# Altium PCB LNA_1.7GHz_main_board.PcbDoc
Units mm, origin at the board's own origin, x right, y up, seen from the top; angles counter-clockwise.
Board outline 141.8 x 55.8 mm, 4 copper layers (Top Layer, AGND, Layer 1, Bottom Layer), stack 0.831 mm thick; 30 components, 13 nets, 109 pads, 31 vias.
Unrouted connection lines stored in the file: 63.
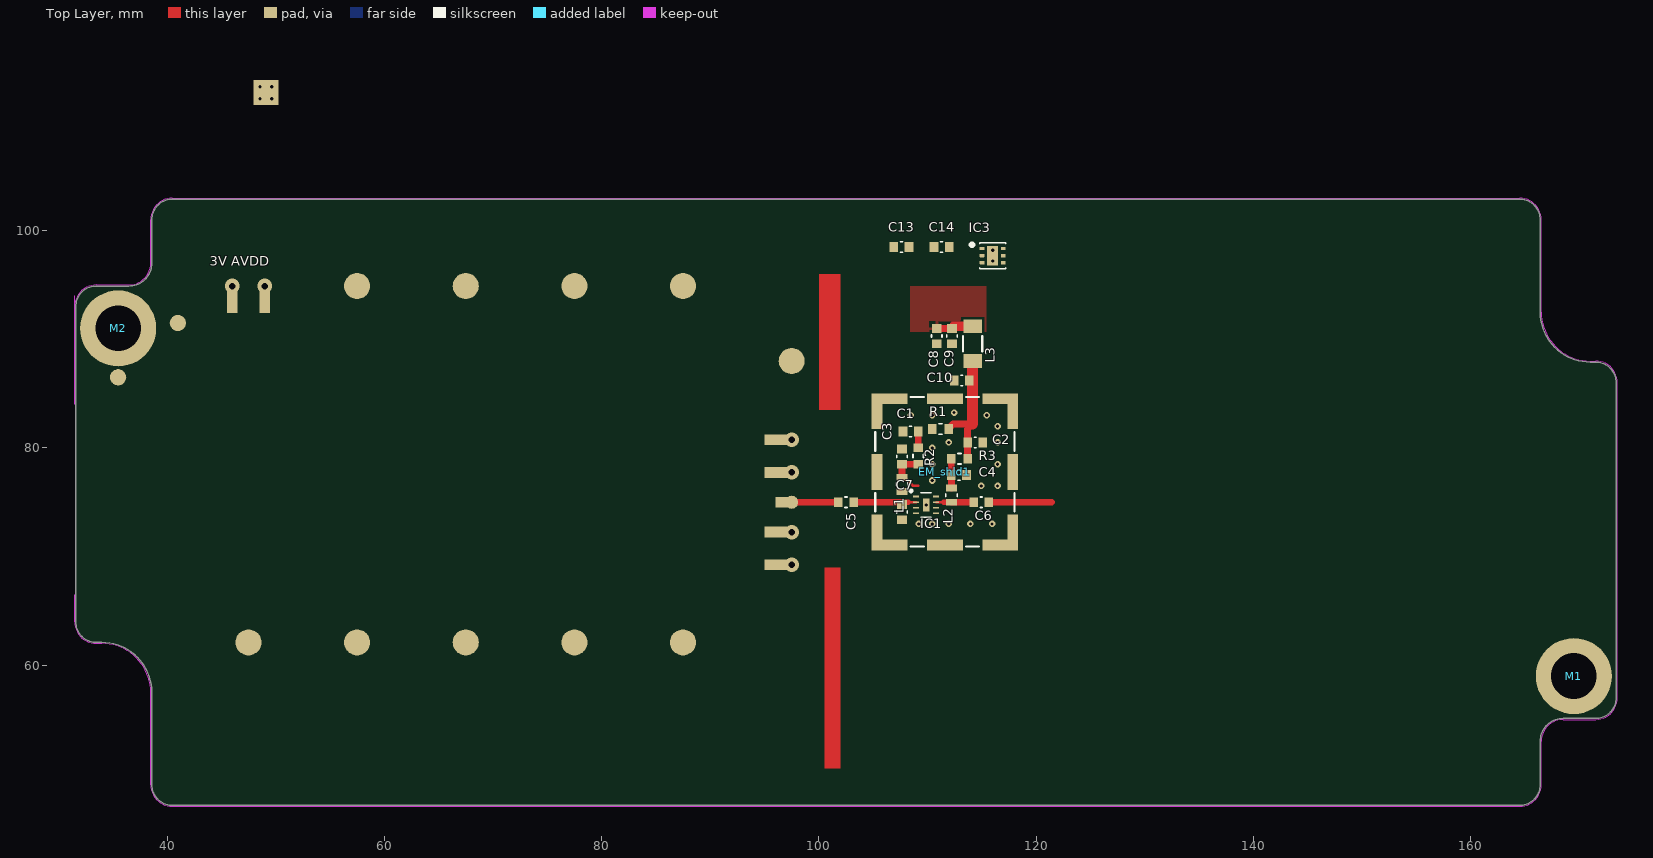
[diagram p0: Top Layer view]
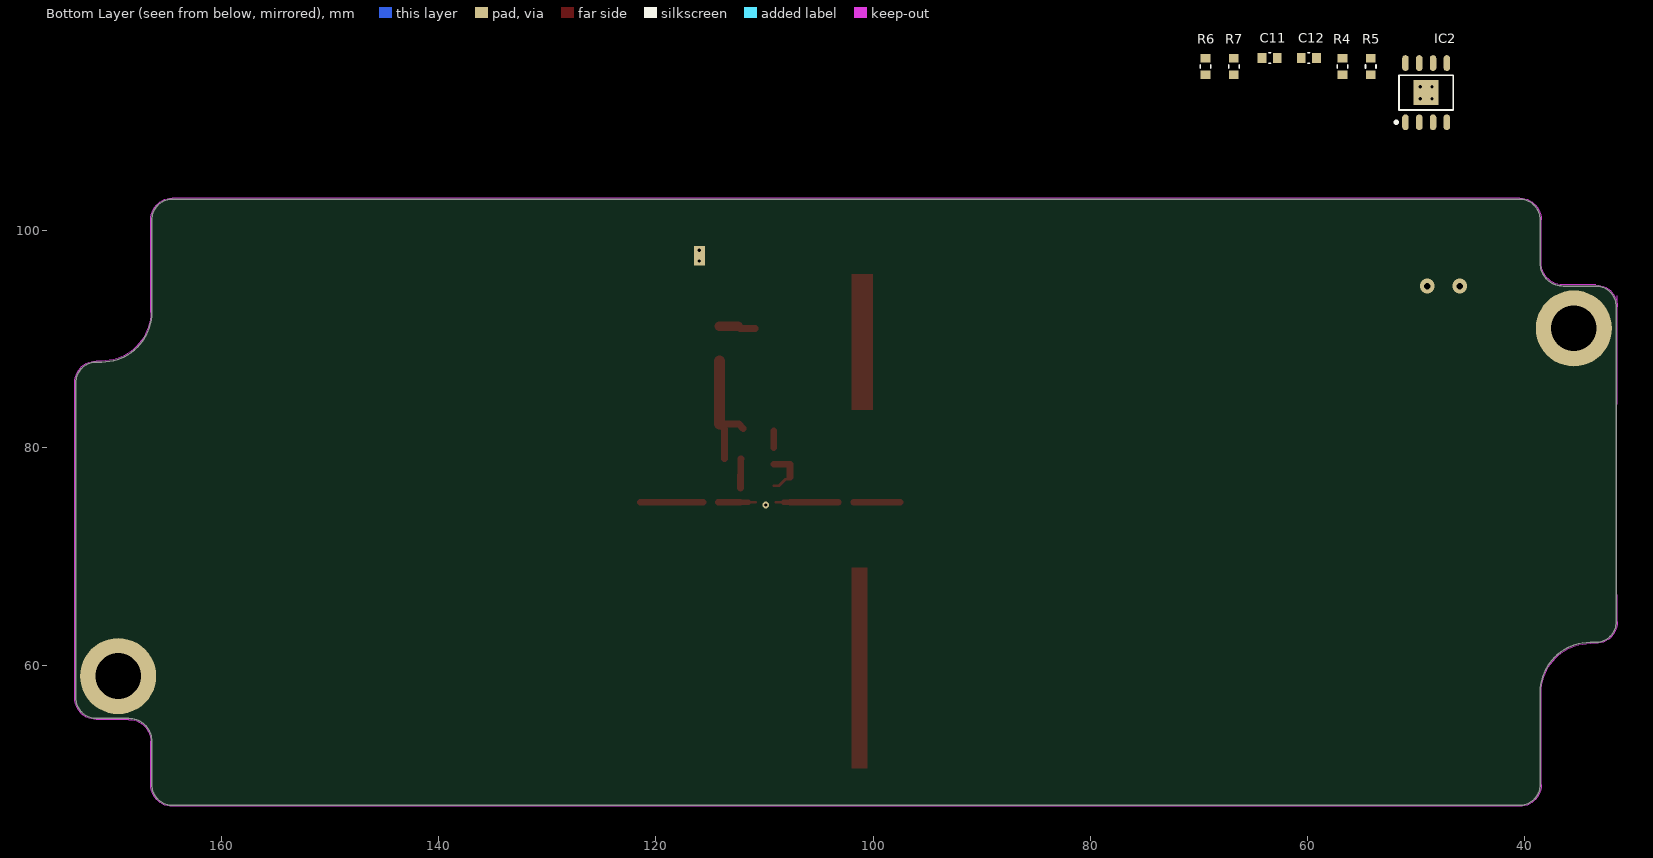
[diagram p1: Bottom Layer view, seen from below]
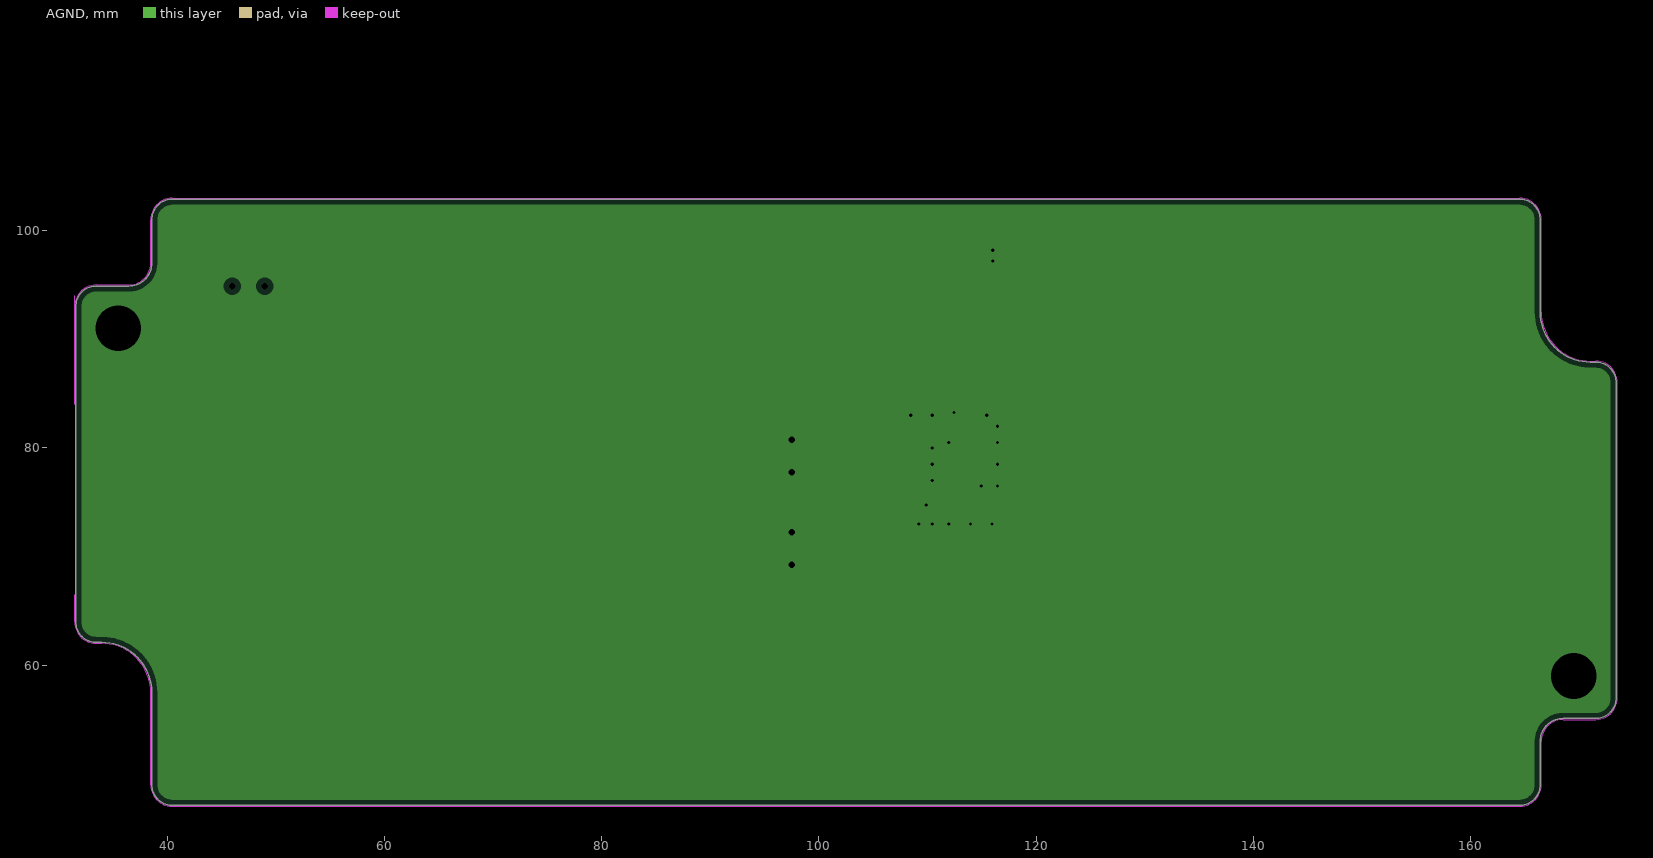
[diagram p2: AGND, clearances drawn from the general rule]

## Layer stack, top to bottom
Top Solder: solder mask 0.0102, Solder Resist, Dk 3.5
Top Layer: signal copper 0.018
Core 1: core 0.3, FR4 (Tg170), Dk 4.4
AGND: plane copper 0.018, net AGND
Prepreg 1: prepreg 0.125, 2116 (Tg170), Dk 5.1
Layer 1: signal copper 0.035
Core 2: core 0.3, FR4 (Tg170), Dk 4.4
Bottom Layer: signal copper 0.035
Bottom Solder: solder mask 0.0102, Solder Resist, Dk 3.5

## Board outline
33.5,62.1 34,62.1 cw(c34,57.5) 38.6,57.5 38.6,49 ccw(c40.5,49) 40.5,47.1 164.5,47.1 ccw(c164.5,49) 166.4,49 166.4,53 cw(c168.5,53) 168.5,55.1 171.5,55.1 ccw(c171.5,57) 173.4,57 173.4,86 ccw(c171.5,86) 171.5,87.9 171,87.9 cw(c171,92.5) 166.4,92.5 166.4,101 ccw(c164.5,101) 164.5,102.9 40.5,102.9 ccw(c40.5,101) 38.6,101 38.6,97 cw(c36.5,97) 36.5,94.9 33.5,94.9 ccw(c33.5,93) 31.6,93 31.6,64 ccw(c33.5,64)

## Design rules (kind name [scope] priority, off if disabled: settings)
Clearance [All] p1: gap=0.254 ignorepadtopadclearanceinfootprint=FALSE except(0: Arc-Hole Track-Hole SMDPad-Hole THPad-Hole Via-Hole Fill-Hole Poly-Hole Region-Hole Text-Hole)
PlaneClearance [All] p1: clearance=0.508
PlaneConnect [All] p1: planeconnectstyle=Direct reliefexpansion=0.508 reliefentries=4 reliefconductorwidth=0.254 reliefairgap=0.254
PolygonConnect [All] p1: thpad.connectstyle=Relief thpad.reliefconductorwidth=0.254 thpad.reliefentries=4 thpad.polygonreliefangle="90 Angle" thpad.airgapwidth=0.254 smdpad.connectstyle=Relief smdpad.reliefconductorwidth=0.254 smdpad.reliefentries=4 smdpad.polygonreliefangle="90 Angle" smdpad.airgapwidth=0.254 via.connectstyle=Direct via.reliefconductorwidth=0.254 via.reliefentries=4 via.polygonreliefangle="90 Angle" via.airgapwidth=0.254
RoutingVias [All] p1: holewidth=0.711 width=1.27 viastyle="Through Hole" minholewidth=0.711 minwidth=1.27 maxholewidth=0.711 maxwidth=1.27
SolderMaskExpansion [All] p1: expansion=0.102 istentingtop=FALSE
Width [All] p1: maxlimit=2.54 minlimit=0.15 preferedwidth=0.254 toplayer_prefwidth=0.575 impedanceprofiledriven=TRUE impedanceprofileid={E40D00CD-2FD9-45DB-8FD6-8CAF1FACEA0F} impedanceprofilevalue=50.000000 minimp=50.000000 maximp=50.000000 favimp=50.000000
28 further rules are at their usual default settings.

## Components (designator, comment, footprint, x,y, rotation, side; value= is the part's Value field where it differs from the comment)
C1 "4.7uF" C0603#1 108.45,81.5 r0 top
C2 "4.7uF" C0603#1 114.4,80.5 r0 top
C3 "100pF" C0603#1 107.65,79.2 r270 top
C4 "100pF" C0603#1 112.9,77.5 r0 top
C5 "100pF" C0603#2 102.5,75 r0 top locked
C6 "100pF" C0603#2 114.95,75 r0 top
C7 "100pF" C0603#1 107.65,74.1 r90 top
C8 "4.7uF" C0603#1 110.85,90.3 r90 top
C9 "0.1uF" C0603#1 112.25,90.3 r90 top
C10 "0.1uF" C0603#1 113.15,86.2 r0 top
C11 "4.7uF" C0603#1 63.5,115.9 r180 bottom
C12 "4.7uF" C0603#1 59.9,115.9 r180 bottom
C13 "1uF" C0603#1 107.6,98.5 r0 top
C14 "1uF" C0603#1 111.3,98.5 r0 top
EM_shld1 "3610213126S" 3610213126S 111.6,77.794 r0 top locked
IC1 "PMA2-43LN+" MC1631-1_MNC-L 109.876,74.746 r0 top locked
IC2 "ADP7118" SOIC_N_EP 49.1,112.7 r90 bottom
IC3 "LP5912-5.0DRVT" WSON-6 116,97.7 r0 top
L1 "33nH" L0603_HP 107.65,76.65 r270 top
L2 "8.2nH" L0603_HP 112.2,75.65 r270 top
L3 "1uH" L1206_Murata 114.15,89.6 r90 top
M1 "Via" Mechanical_Via 169.5,59 r0 top locked
M2 "Via" Mechanical_Via 35.5,91 r0 top
R1 "5.11kΩ" R0603 111.2,81.75 r180 top
R2 "0Ω" R0603 109.15,79.262 r90 top
R3 "0Ω" R0603 112.938,79 r0 top
R4 "40.2kΩ" R0603 56.8,115.1 r90 bottom
R5 "15kΩ" R0603 54.2,115.1 r90 bottom
R6 "10kΩ" R0603 69.4,115.1 r90 bottom
R7 "10kΩ" R0603 66.8,115.1 r90 bottom

## Footprints (in the part's own frame and the unit in brackets; to place one, negate y for a bottom-side part, rotate by r counter-clockwise, add the part's x,y. Pads: shape width x height; smd on the part's side, far side on the other; paste and mask are expansions set on the pad)
3610213126S [mm] "Shielding Cabinet, SMD Frame, body 12.7x13.66mm"
  rect 1x3.3 smd: 1(-6.25,-5.58) 1(-6.25,0) 1(-6.25,5.58) 1(6.25,-5.58) 1(6.25,0) 1(6.25,5.58)
  rect 3.3x1 smd: 1(-5.1,-6.73) 1(-5.1,6.73) 1(0,-6.73) 1(0,6.73) 1(5.1,-6.73) 1(5.1,6.73)
  silkscreen extent -6.4,-6.88 6.4,6.88, body extent -6.35,-6.83 6.35,6.83, height 2.55
C0603#1 [mm] "Chip Capacitor, Body 1.6x0.8mm, IPC High Density"
  rect 0.8x0.9 smd: 1(-0.7,0) 2(0.7,0)
  silkscreen extent -0.1,-0.48 0.1,0.48, body extent -0.8,-0.4 0.8,0.4, height 0.79
C0603#2 [mm] "Chip Capacitor, Body 1.6x0.8mm, IPC High Density"
  rect 0.8x0.9 smd mask+0.254: 1(-0.7,0) 2(0.7,0)
  silkscreen extent -0.1,-0.48 0.1,0.48, body extent -0.8,-0.4 0.8,0.4, height 0.79
L0603_HP [mm]
  rect 0.64x1.02 smd: 1(-0.65,0)
  rect 0.64x1.02 smd mask+0.254: 2(0.65,0)
  silkscreen extent -0.13,-0.53 0.13,0.53, body extent -0.88,-0.54 0.87,0.55, height 0.93
L1206_Murata [mm]
  rect 1.25x1.7 smd: 1(-1.6,0) 2(1.6,0)
  silkscreen extent -0.71,-0.89 0.71,0.89, body extent -1.6,-0.8 1.6,0.8, height 1.5
MC1631-1_MNC-L [mil]
  rect 21.87x7.03 smd paste+0 mask+0: BIAS(-36.44,30) GND(-36.44,-30) GND(-36.44,-10) GND(36.44,-30) GND(36.44,-10) GND(36.44,30) RF-IN(-36.44,10) RF-OUT(36.44,10)
  rect 24x47 smd paste+0 mask+4: GND(0,0)
  silkscreen extent -59,-44 18,55, body extent -39,-39 39,39, height 41
Mechanical_Via [mm] "Mechanical_Via"
  round 7 hole 4.2: 0(0,0)
R0603 [mm]
  rect 0.8x0.9 smd: 1(-0.762,0) 2(0.762,0)
  silkscreen extent -0.15,-0.48 0.15,0.48, body extent -0.85,-0.4 0.85,0.4, height 0.56
SOIC_N_EP [mm] "SOIC, 8-Leads, Body 4,90x3,90mm, Pitch 1,27mm, Thermal Pad 2,29x2,29mm, IPC Medium Density"
  oval 1.45x0.6 smd: 1(-2.725,1.905) 2(-2.725,0.635) 3(-2.725,-0.635) 4(-2.725,-1.905) 5(2.725,-1.905) 6(2.725,-0.635) 7(2.725,0.635) 8(2.725,1.905)
  rect 2.29x2.29 all layers, no hole: 9(0,0)
  silkscreen extent -2.85,-2.5 1.6,2.88, body extent -3,-2.45 3,2.45, height 1.65
WSON-6 [mm] "PLASTIC SMALL OUTLINE - NO LEAD"
  rect 1x1.8 all layers, no hole: 0(0,0)
  rrect25% 0.45x0.3 smd: 1(-0.975,0.65) 2(-0.975,0) 3(-0.975,-0.65) 4(0.975,-0.65) 5(0.975,0) 6(0.975,0.65)
  silkscreen extent -2.03,-1.2 1.2,1.2, body extent -1.01,-1 1.01,1, height 0.8

## Part data
C1 C2 C3 C4 C5 C6 C7 C8 C9 C10 C11 C12 C13 C14: library part CAP, "Керамический конденсатор", Вид монтажа=SMD, Диэлектрик=X5R, Напряжение=16B, Температурный диапазон="-55 ~ 100", Тип элемента="Керамический конденсатор"
  C1 C2 C8: Корпус="0603 [1608 Метрический]", Номинал=4.7uF
  C3 C4 C5 C6 C7: Корпус="0603 [1608 Метрический]", Номинал=100pF
  C9 C10: Корпус="0603 [1608 Метрический]", Номинал=0.1uF
  C11 C12: Корпус="0603 (1608 Metric)", Номинал=4.7uF
  C13 C14: Корпус="0603 (1608 Metric)", Номинал=1uF
EM_shld1: library part "RF Shield", "RF Shield Frame X 0.522\" (13.26mm) Surface Mount", Артикул=3610213126S, Вид монтажа=SMD/SMT, Корпус="0.522\" (13.26mm)", Примечание="Mate with 3600213120S (Two pieces shield)", Производитель="Wurth Elektronik", Тип элемента="EMI/RFI Shield, One-Piece"
IC1: "Малошумяший усилитель", Артикул=PMA2-43LN+, Вид монтажа=SMD, Название=PMA2-43LN+, Производитель=Mini-Circuits, Температурный диапазон="-40 ~ 100", Тип элемента=Микросхема
IC2: "Микросхема линейный преобразователь", Вид монтажа=SMD, Корпус="8-Pin SOIC PowerPAD", Название=ADP7118, Напряжение="2.7-20 B", Примечание=200mА, Производитель="Analog Devices", Температурный диапазон="−40°C to + 150°C", Тип элемента=Микросхема
IC3: library part LP5912, "Микросхема линейный преобразователь", Артикул=LP5912-5.0DRVT, Вид монтажа=SMD, Корпус=WSON, Название=LP5912, Примечание=500mА, Производитель="Texas Instruments", Температурный диапазон="−40°C to + 150°C", Тип элемента=Микросхема
L1 L2: library part "Inducror RF", "Индуктивность", Вид монтажа=SMD, Корпус="0603 [1608 Метрический]", Производитель=Coilcraft, Температурный диапазон="-40ºC to 125ºC", Тип элемента="Катушка индуктивности"
  L1: Номинал=33nH
  L2: Номинал=8.2nH
L3: library part "Inducror LF", "Индуктивность", Вид монтажа=SMD, Корпус="1206 [3216 Metric]", Номинал=1uH, Производитель=Murata, Температурный диапазон="-40ºC to 125ºC", Тип элемента="Катушка индуктивности"
M1 M2: library part "Mechanical Via", "Mechanical Via"
R1 R2 R3 R4 R5 R6 R7: library part RES, "SMD резистор", Вид монтажа=SMD, Название=Резистор, Тип элемента=Резистор, Точность=1%
  R1: Корпус="0603 [1608 Метрический]", Номинал=5.11kΩ, Производитель=1%
  R2 R3: Корпус="0603 [1608 Метрический]", Номинал=0Ω, Производитель=1%
  R4: Корпус="0603 (1608 Metric)", Номинал=40.2kΩ
  R5: Корпус="0603 (1608 Metric)", Номинал=15kΩ
  R6 R7: Корпус="0603 (1608 Metric)", Номинал=10kΩ

## Free pads (board coordinates)
  rect 1x2.5 smd: 3V3_AVDD(46,93.65) 3V3_AVDD(49,93.65)
  round 1.5 smd: GND(35.5,86.5) GND(41,91.5)
  round 2.4 smd: GND(47.5,62.1) GND(57.5,62.1) GND(57.5,94.9) GND(67.5,62.1) GND(67.5,94.9) GND(77.5,62.1) GND(77.5,94.9) GND(87.5,62.1) GND(87.5,94.9) GND(97.5,88)
  rect 2.5x1 smd: GND(96.25,69.25) GND(96.25,72.25) GND(96.25,77.75) GND(96.25,80.75)
  rect 1.5x1 smd mask+0.254: "RF IN"(96.75,75)
  rect 1.4x0.9 on Plane1 mask+0.254: "RF IN"(96.75,75)
  round 1.2 smd: "RF IN"(97.5,75)
  round 1.1 on Plane1: "RF IN"(97.5,75)

## Via types
v1: diameter 0.6, hole 0.3, Top Layer to AGND, tented both sides, 18 vias
v2: diameter 0.6, hole 0.3, Top Layer to Bottom Layer, 7 vias
v3: diameter 1.35, hole 0.6, Top Layer to AGND, 4 vias
v4: diameter 1.35, hole 0.6, Top Layer to Bottom Layer, 2 vias

## Nets (pads, with @x,y where several pads share a name; then routed paths per layer and width w, separated by ;. In a path a pad name is that pad's centre, name@x,y a point inside that pad or via, vN(x,y) a via of type N, cw(c..) or ccw(c..) an arc to the next point about the centre after c; other vN are vias at no path point)
3V_AVDD: C12.2 IC2.1 IC2.2 pad.3V3_AVDD R5.2
  other v4: 46,94.9 49,94.9
5V_AVDD: C8.2 C9.2 C11.2 C14.2 IC2.7 IC2.8 IC3.1 L3.2 R4.2 | length 3.1
  Top Layer w0.635: C8.2 C9.2
  Top Layer w0.9: C9.2@112.45,91.2 L3.2
_5V_AVDD_flt: C2.1 C10.2 L3.1 R1.1 R3.2 | length 11.5
  Top Layer w0.635: R1.1@111.962,81.8 112.362,82.2 114.15,82.2 113.7,81.75 C2.1 R3.2
  Top Layer w1: 114.15,82.2 L3.1
AGND: C1.1 C2.2 C3.1 C4.2 C7.1 C8.1 C9.1 C10.1 C11.1 C12.1 C13.1 C14.1 EM_shld1.1 IC1.GND IC2.4 IC2.9 IC3.0 IC3.2 IC3.5 M1.0 M2.0 pad.GND R6.1 R7.1
  other v1: 109.2,73 110.45,73 111.95,73 113.95,73 115.95,73 114.95,76.5 116.45,76.5 110.45,77 110.45,78.5 116.45,78.5 110.45,80 111.95,80.5 116.45,80.5 116.45,82 108.45,83 110.45,83 115.45,83 112.45,83.25
  other v2: 109.876,74.746 116,97.2 116,98.2 48.55,112.15 49.65,112.15 48.55,113.25 49.65,113.25
  other v3: 97.5,69.25 97.5,72.25 97.5,77.75 97.5,80.75
NetC1_2: C1.2 R1.2 R2.2 | length 1.5
  Top Layer w0.635: R2.2 C1.2@109.15,81.55
NetC3_2: C3.2 IC1.BIAS L1.1 R2.1 | length 4.5
  Top Layer w0.254: L1.1 107.843,77.107 108.093,77.107 108.692,76.508 109.15,76.508
  Top Layer w0.635: L1.1 C3.2 R2.1
NetC4_1: C4.1 L2.1 R3.1 | length 2.7
  Top Layer w0.635: R3.1 112.188,78.988 112.188,77.512 C4.1 L2.1
NetC5_1: "pad.RF IN"@96.75,75 "pad.RF IN"@97.5,75 C5.1 | length 4.3
  Top Layer w0.575: 97.5,75 C5.1
NetC5_2: C5.2 C7.2 IC1.RF-IN L1.2 | length 5.7
  Top Layer w0.254: 108.25,75 IC1.RF-IN
  Top Layer w0.512: C7.2@107.65,75 108.25,75
  Top Layer w0.575: C5.2 C7.2@107.65,75
NetC6_1: C6.1 IC1.RF-OUT L2.2 | length 3.4
  Top Layer w0.254: IC1.RF-OUT 111.501,75
  Top Layer w0.512: 111.501,75 L2.2
  Top Layer w0.575: L2.2 C6.1
NetC13_2: C13.2 IC3.4 IC3.6
NetIC2_3: IC2.3 R5.1 R7.2
NetIC2_5: IC2.5 R4.1 R6.2
pads on no net: C6.2 IC2.6 IC3.3
copper on no net: | length 5.8
  Top Layer w0.575: 115.65,75 121.45,75

## Polygon pours and split planes (outlines as drawn)
no net on Top Layer "NONET_L01_P-001" (solid, remove dead copper, pour order 0): 108.4,94.9 115.4,94.9 115.4,90.7 108.4,90.7
AGND on AGND (split plane): 253 vertices, not listed, extent 32.109,47.609 172.891,102.391

## Keep-outs
Keep-Out Layer:
  lines w0.1: 31.5,64 ccw(c33.5,64) 33.5,62 ; 31.5,64 ccw(c33.5,64) 33.5,62 ; 31.5,64 31.5,66.5 31.5,64 ; 33.5,62 34,62 ; 33.5,62 34,62 ; 33.5,95 ccw(c33.5,93) 31.5,93 cw(c33.5,93) 33.5,95 ; 33.5,95 36.5,95 ; 33.5,95 36.5,95 ; 34,62 cw(c34,57.5) 38.5,57.5 38.5,49 ccw(c40.5,49) 40.5,47 164.5,47 ccw(c164.5,49) 166.5,49 166.5,53 cw(c168.5,53) 168.5,55 171.5,55 ccw(c171.5,57) 173.5,57 173.5,86 ccw(c171.5,86) 171.5,88 171,88 cw(c171,92.5) 166.5,92.5 166.5,101 ccw(c164.5,101) 164.5,103 40.5,103 ccw(c40.5,101) 38.5,101 38.5,97 ; 36.5,95 ccw(c36.5,97) 38.5,97 ; 36.5,95 ccw(c36.5,97) 38.5,97 ; 31.5,84 31.5,94 31.5,84

## Other copper
Top Layer:
  rectangle: 100.5,50.5 102,69
  rectangle: 100,83.5 102,96

## Silkscreen, mask and mechanical layers (free items; w line width, h text height)
Top Overlay:
  text "3V AVDD" at 43.932,96.447 h1.52
Mechanical 1:
  pour cut-out: 104.15,84.25 115.9,84.25 115.9,71.4 104.15,71.4
Dimensions:
  circle w0.05: c35.5,91 r0.025
  circle w0.1: c35.5,91 r2
  circle w0.1: c169.5,59 r2
  circle w0.05: c169.5,59 r0.025
  circle w0.1: c35.5,91 r2
  circle w0.05: c35.5,91 r0.025
  lines w0.1: 26,75 176,75 ; 102.5,43 102.5,107 ; 31.6,64 ccw(c33.5,64) 33.5,62.1 ; 31.6,64 ccw(c33.5,64) 33.5,62.1 ; 31.6,64 ccw(c33.5,64) 33.5,62.1 ; 31.6,64 31.6,86.5 39,86.5 ccw(c39,88.5) 41,88.5 41,94.9 97.5,94.9 97.5,62.1 33.5,62.1 ; 31.6,64 31.6,93 ; 31.6,64 31.6,93 ; 31.6,88 31.6,93 ; 31.6,88 36.5,88 ; 31.6,88 36.5,88 ; 31.6,88 31.6,93 ; 31.6,93 cw(c33.5,93) 33.5,94.9 ; 31.6,93 cw(c33.5,93) 33.5,94.9 ; 31.6,93 cw(c33.5,93) 33.5,94.9 ; 31.6,93 cw(c33.5,93) 33.5,94.9 ; 33.5,62.1 34,62.1 ; 33.5,62.1 34,62.1 ; 33.5,94.9 36.5,94.9 ; 33.5,94.9 36.5,94.9 ; 33.5,94.9 36.5,94.9 ; 33.5,94.9 36.5,94.9 ; 34,62.1 cw(c34,57.5) 38.6,57.5 38.6,49 ccw(c40.5,49) 40.5,47.1 164.5,47.1 ccw(c164.5,49) 166.4,49 166.4,53 ; 36.5,88 ccw(c36.5,90.1) 38.6,90.1 ; 36.5,88 ccw(c36.5,90.1) 38.6,90.1 ; 36.5,94.9 ccw(c36.5,97) 38.6,97 ; 36.5,94.9 ccw(c36.5,97) 38.6,97 ; 36.5,94.9 ccw(c36.5,97) 38.6,97 ; 36.5,94.9 ccw(c36.5,97) 38.6,97 ; 38.6,90.1 38.6,97 ; 38.6,90.1 38.6,97 ; 38.6,97 38.6,101 cw(c40.5,101) 40.5,102.9 164.5,102.9 cw(c164.5,101) 166.4,101 166.4,92.5 ccw(c171,92.5) 171,87.9 171.5,87.9 cw(c171.5,86) 173.4,86 173.4,57 ; 166.4,53 cw(c168.5,53) 168.5,55.1 ; 166.4,53 cw(c168.5,53) 168.5,55.1 ; 166.4,53 166.4,59.9 cw(c168.5,59.9) 168.5,62 173.4,62 173.4,57 ; 168.5,55.1 171.5,55.1 ; 168.5,55.1 171.5,55.1 ; 171.5,55.1 ccw(c171.5,57) 173.4,57 ; 171.5,55.1 ccw(c171.5,57) 173.4,57
Board Shape:
  the board outline again, w0.1

## Dimensions
33.5,62.1 to 26,75 on Dimensions
40.5,47.1 to 40.5,102.9 on Dimensions
31.6,64 to 173.4,57 on Dimensions